# Altium PCB PCB1.PcbDoc
Units mm, origin at the board's own origin, x right, y up, seen from the top; angles counter-clockwise.
Board outline 55 x 35 mm, 2 copper layers (Top Layer, Bottom Layer), stack 1.1 mm thick; 16 components, 15 nets, 69 pads, 2 vias.
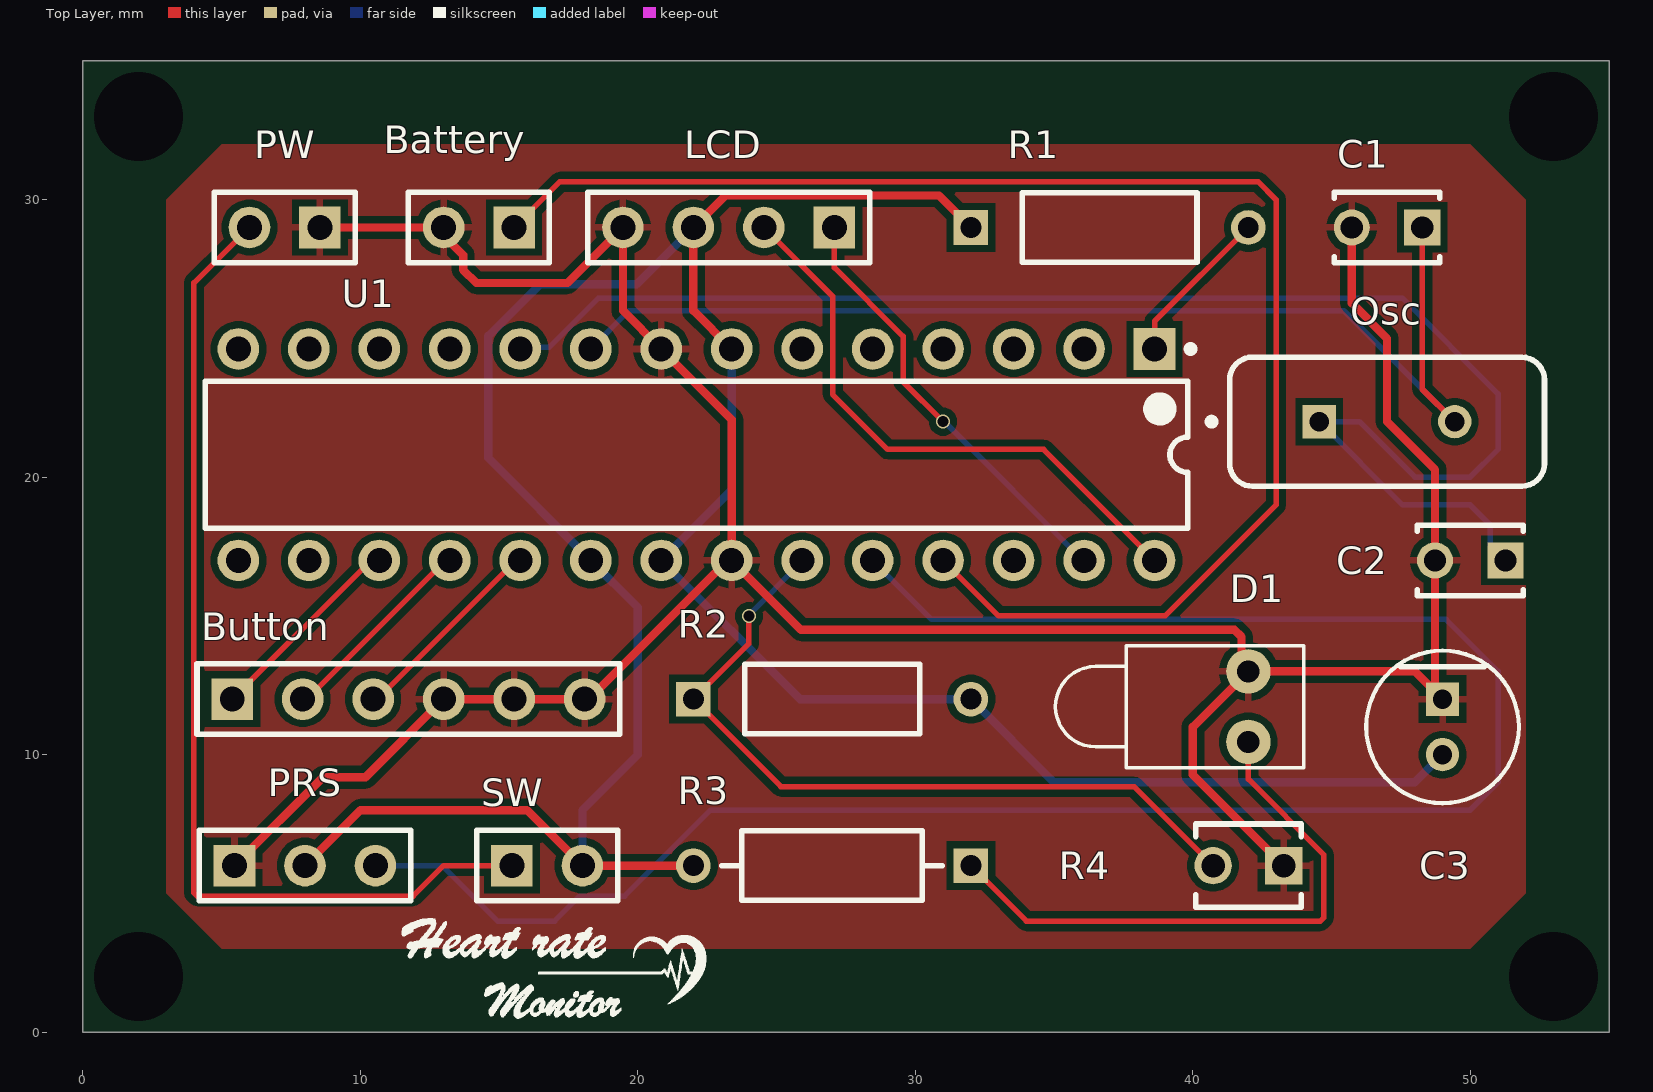
[diagram p0: Top Layer view]
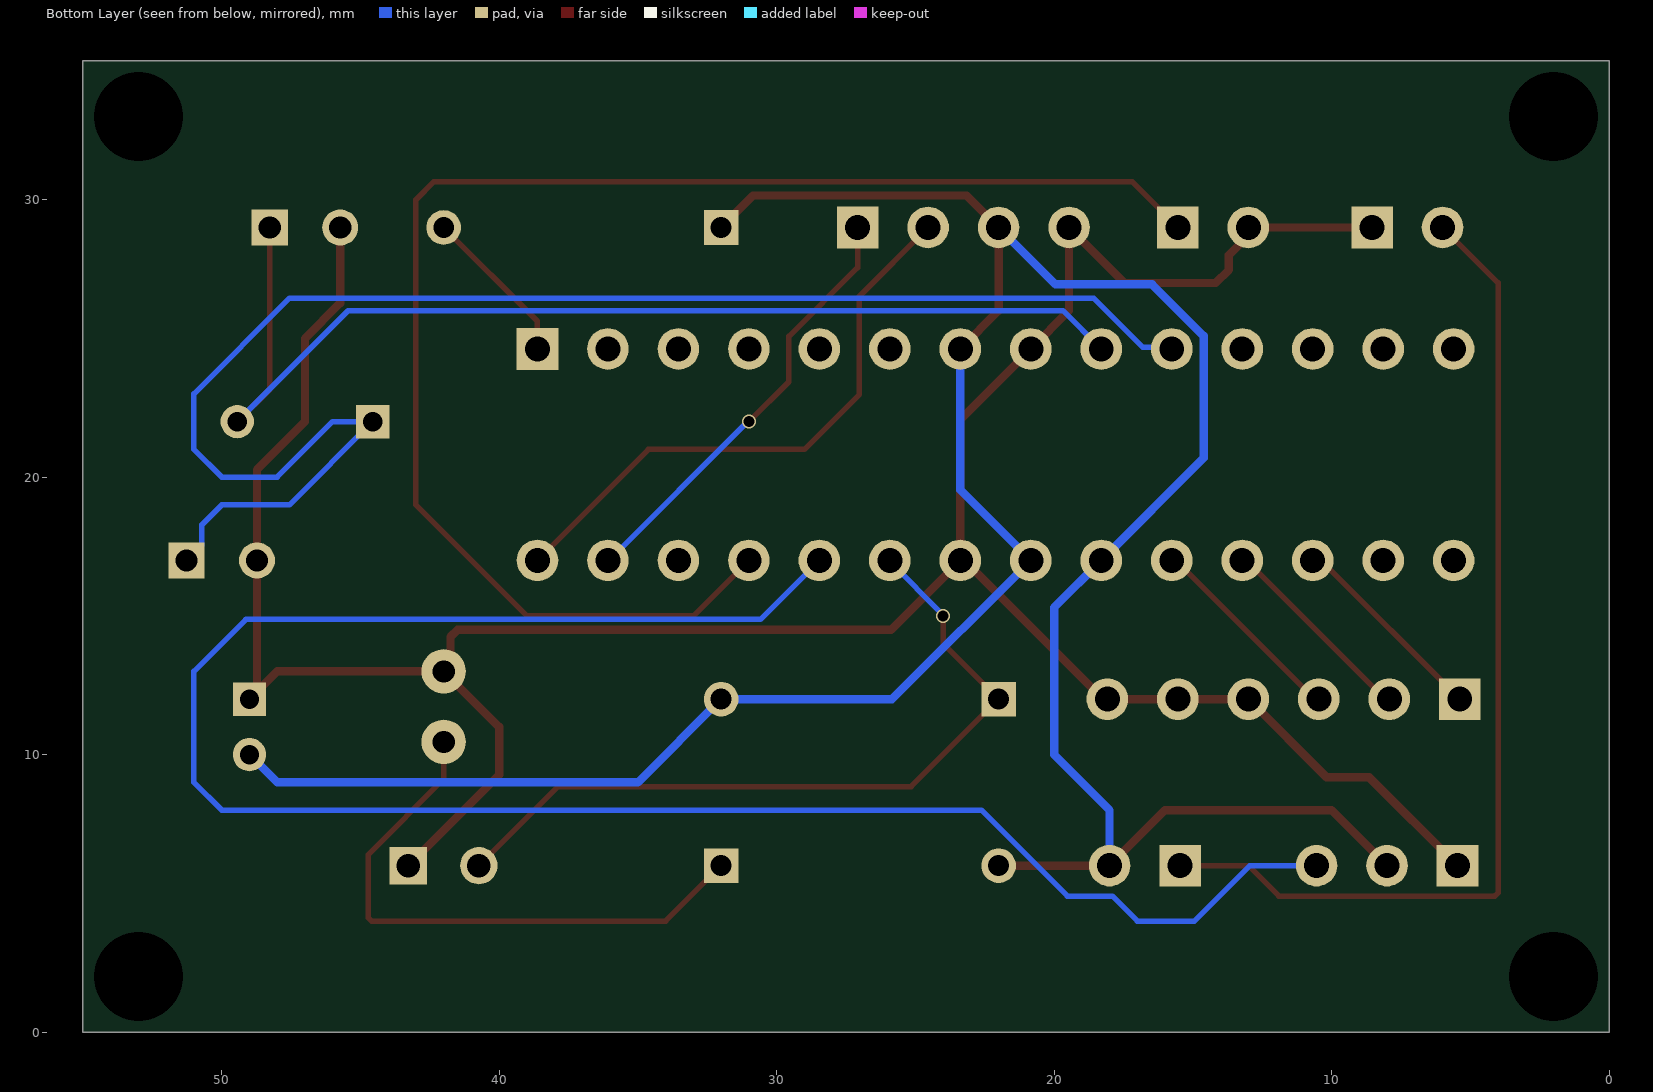
[diagram p1: Bottom Layer view, seen from below]

## Layer stack, top to bottom
Top Solder: solder mask 0.05, SM-001, Dk 4
Top Layer: signal copper 0.1
Dielectric 1: dielectric 0.9, FR-4, Dk 4.8
Bottom Layer: signal copper 0.1
Bottom Solder: solder mask 0.05, SM-001, Dk 4

## Board outline
0,0 55,0 55,35 0,35

## Design rules (kind name [scope] priority, off if disabled: settings)
Clearance [All] p1: gap=0.25 ignorepadtopadclearanceinfootprint=FALSE
HoleSize [All] p1: absolutevalues=TRUE maxlimit=3.5 minlimit=0.025 maxpercent=80.000 minpercent=20.000
PolygonConnect [All] p1: connectstyle=Relief reliefconductorwidth=0.254 reliefentries=4 polygonreliefangle="90 Angle" airgapwidth=0.254
RoutingVias [All] p1: holewidth=0.4 width=0.5 viastyle="Through Hole" minholewidth=0.4 minwidth=0.5 maxholewidth=0.4 maxwidth=0.5
SilkToSolderMaskClearance [IsPad] p1: minsilkscreentomaskgap=0.06 clearancetoexposedcopper=TRUE
SolderMaskExpansion [All] p1: expansion=0.102 istentingtop=FALSE
Width Width_PW [(InNet('5V') OR InNet('GND'))] p1: maxlimit=0.3 minlimit=0.2 preferedwidth=0.3
Width [All] p2: maxlimit=0.2 minlimit=0.1 preferedwidth=0.2
28 further rules are at their usual default settings.

## Components (designator, comment, footprint, x,y, rotation, side; value= is the part's Value field where it differs from the comment)
Battery "Header 2" HDR1X2 15.54,29 r180 top
Button "Header 6" HDR1X6 5.38,12 r0 top
C1 "C315C220K1G5TA" KEMT-C315-THT-2 47,29 r180 top
C2 "C315C220K1G5TA" KEMT-C315-THT-2 50,17 r180 top
C3 "ECA2AM100" FP-RAD-TH-D_5_0_5-L_11_1-MFG 49,11 r270 top
D1 "LED1" LED-1 42,11.73 r180 top
LCD "Header 4" HDR1X4 27.08,29 r180 top
Osc "Osc1" FOX-FOXSLF160-20 47,22 r0 top
PRS "Header 3" HDR1X3 5.46,6 r0 top (schematic designator "Pulse Rate Sensor")
PW "Header 1" HDR1X2 8.54,29 r180 top
R1 "MBB02070C1002FCT00" FP-MBB0207-MFG 37,29 r0 top
R2 "MBB02070C1002FCT00" FP-MBB0207-MFG 27,12 r0 top
R3 "MRS25000C1001FCT00" FP-MRS25-MFG 27,6 r180 top
R4 "NTCLE100E3104JB0" FP-NTCLE100E3104JB0-MFG 42,6 r180 top
SW "Header 2" HDR1X2 15.46,6 r0 top
U1 "ATmega328P-PU" 28P3 22.11,20.81 r270 top

## Footprints (in the part's own frame and the unit in brackets; to place one, negate y for a bottom-side part, rotate by r counter-clockwise, add the part's x,y. Pads: shape width x height; smd on the part's side, far side on the other; paste and mask are expansions set on the pad)
28P3 [mm] "28-Pin Plastic Dual In-Line Package (PDIP)"
  rect 1.5x1.5 hole 0.9: 1(-3.81,16.51)
  round 1.5 hole 0.9: 2(-3.81,13.97) 3(-3.81,11.43) 4(-3.81,8.89) 5(-3.81,6.35) 6(-3.81,3.81) 7(-3.81,1.27) 8(-3.81,-1.27) 9(-3.81,-3.81) 10(-3.81,-6.35) 11(-3.81,-8.89) 12(-3.81,-11.43) 13(-3.81,-13.97) 14(-3.81,-16.51) 15(3.81,-16.51) 16(3.81,-13.97) 17(3.81,-11.43) 18(3.81,-8.89) 19(3.81,-6.35) 20(3.81,-3.81) 21(3.81,-1.27) 22(3.81,1.27) 23(3.81,3.81) 24(3.81,6.35) 25(3.81,8.89) 26(3.81,11.43) 27(3.81,13.97) 28(3.81,16.51)
  silkscreen extent -3.93,-17.7 2.65,17.94, body extent -3.6,-17.65 3.6,17.65, height 4.58
FOX-FOXSLF160-20 [mm] "THD, 2-Leads, Body 11.35x4.65mm"
  rect 1.2x1.2 hole 0.7: 1(-2.44,0)
  round 1.2 hole 0.7: 2(2.44,0)
  silkscreen extent -6.45,-2.32 5.68,2.32, body extent -5.67,-2.32 5.68,2.33, height 3.6
FP-MBB0207-MFG [mm]
  rect 1.25x1.25 hole 0.75 paste-1000 mask+0: 1(-5,0)
  round 1.25 hole 0.75 paste-1000 mask+0: 2(5,0)
  silkscreen extent -3.15,-1.25 3.15,1.25, body extent -5.72,-1.35 5.72,1.35, height 0.25
FP-MRS25-MFG [mm]
  rect 1.25x1.25 hole 0.75 paste-1000 mask+0: 1(-5,0)
  round 1.25 hole 0.75 paste-1000 mask+0: 2(5,0)
  silkscreen extent -3.98,-1.25 3.98,1.25, body extent -5.72,-1.35 5.72,1.35, height 0.25
FP-NTCLE100E3104JB0-MFG [mm]
  rect 1.35x1.35 hole 0.85 paste-1000 mask+0: 1(-1.27,0)
  round 1.35 hole 0.85 paste-1000 mask+0: 2(1.27,0)
  silkscreen extent -1.9,-1.5 1.9,1.5, body extent -2.04,-1.6 2.04,1.6, height 0.25
FP-RAD-TH-D_5_0_5-L_11_1-MFG [mm]
  rect 1.2x1.2 hole 0.7 paste-1000 mask+0: 1(-1,0)
  round 1.2 hole 0.7 paste-1000 mask+0: 2(1,0)
  silkscreen extent -2.75,-2.75 2.75,2.75, body extent -2.85,-2.85 2.85,2.85, height 0.25
HDR1X2 [mm] "Connector; Header; 2 Position"
  rect 1.5x1.5 hole 0.9: 1(0,0)
  round 1.5 hole 0.9: 2(2.54,0)
  silkscreen extent -1.27,-1.27 3.81,1.27
HDR1X3 [mm] "Connector; Header; 3 Position"
  rect 1.5x1.5 hole 0.9: 1(0,0)
  round 1.5 hole 0.9: 2(2.54,0) 3(5.08,0)
  silkscreen extent -1.27,-1.27 6.35,1.27
HDR1X4 [mm] "Connector; Header; 4 Position"
  rect 1.5x1.5 hole 0.9: 1(0,0)
  round 1.5 hole 0.9: 2(2.54,0) 3(5.08,0) 4(7.62,0)
  silkscreen extent -1.27,-1.27 8.89,1.27
HDR1X6 [mm] "Connector; Header; 6 Position"
  rect 1.5x1.5 hole 0.9: 1(0,0)
  round 1.5 hole 0.9: 2(2.54,0) 3(5.08,0) 4(7.62,0) 5(10.16,0) 6(12.7,0)
  silkscreen extent -1.27,-1.27 13.97,1.27
KEMT-C315-THT-2 [mm] "THD, 2-Leads, Body 3.81x2.54mm"
  rect 1.3x1.3 hole 0.8: 1(-1.27,0)
  round 1.3 hole 0.8: 2(1.27,0)
  silkscreen extent -1.91,-1.27 1.91,1.27, body extent -1.91,-1.27 1.91,1.27, height 4.66
LED-1 [mm] "LED; 2 Leads"
  round 1.6 hole 0.8: 1(0,1.27) 2(0,-1.27)
  silkscreen extent -2,-2.2 6.95,2.2

## Part data
Battery SW: "Header, 2-Pin", LatestRevisionDate=17-Jul-2002, LatestRevisionNote="Re-released for DXP Platform.", Publisher="Altium Limited"
Button: "Header, 6-Pin", LatestRevisionDate=17-Jul-2002, LatestRevisionNote="Re-released for DXP Platform.", Publisher="Altium Limited"
C1 C2: library part CMP-1664-00008-1, "Capacitor, Ceramic, 22 pF, +/-10 %, 100 V, -55 to 125 degC, 2-Pin THD, RoHS, Bulk", Case\Package=TO-220, Max Input Voltage="40 V", Max Operating Temperature="125 degC", Max Ouput Current="1.5 A", Min Input Voltage="4.2 V", Min Operating Temperature="0 degC", Output Voltage="1.2 V", Package Quantity=50, ComponentLink1Description="Manufacturer URL", ComponentLink1URL=http://www.kemet.com/, ComponentLink2Description=Datasheet, ComponentLink2URL=http://capacitoredge.kemet.com/capedge2/DataSheet/Datasheet-C315C220K1G5TA.pdf?pn=C315C220K1G5TA{BULK}, DatasheetVersion=Aug-16, Height="9.28 mm", Length="10.28 mm", Mount="Through Hole", Output Current="1.5 A", Outputs=1, PackageDescription="2-Pin Through Hole Device, Body 3.81 x 2.54 mm", PackageReference=C315-THT-2, Packaging=Rail/Tube, Pins=3, Radiation Hardening=No, REACH SVHC="No SVHC", RoHSCompliant=true, Weight="0.08113 oz", Width="4.82 mm"
C3: library part CMP-05427-000869-1, "Aluminum Electrolytic Capacitors (Radial Lead Type) 10uF ±20% 100V", Capacitance=10uF, Case/Package=Radial, Dielectric Material=Aluminium, Leakage Current=3uA, Max Operating Temperature=85°C, Min Operating Temperature=-40°C, Package Quantity=200, Ripple Current=70mA, Tolerance=20%, Voltage=100V, Construction=RADIAL, Contact Plating=Tin, Diameter=5mm, Dissipation Factor=0.1%, Height=11mm, Height - Seated (Max)=0.472inch, Lead Diameter=0.5mm, Lead Free="Lead Free", Lead Pitch=2mm, Lead/Base Style=Straight, Length=11mm, Life (Hours)=2000Hour, Mount="Through Hole", Number of Pins=2, Packaging=Bulk, Polarity=Polar, Radiation Hardening=No, REACH SVHC="No SVHC", Ripple Current (AC)=70mA, RoHS Compliant=Yes, Series=M, Termination=Radial, Voltage Rating=100V, Voltage Rating (DC)=100V, Width=5mm
D1: "Typical RED GaAs LED", LatestRevisionDate=08-Jul-2005, LatestRevisionNote="Mech Layer 1 removed.", PackageDescription="LED; 2 Leads", PackageReference=LED-1, Published=8-Jun-2000, Publisher="Altium Limited"
LCD: "Header, 4-Pin", LatestRevisionDate=17-Jul-2002, LatestRevisionNote="Re-released for DXP Platform.", Publisher="Altium Limited"
Osc: library part CMP-1749-00003-1, "Resistance Weld Thru-Hole Crystal, 16 MHz, -20 to 70 degC, 2-Pin THD, RoHS, Bulk", Case\Package=Axial, Max Operating Temperature="155 degC", Min Operating Temperature="-55 degC", Package Quantity=200, Power Rating="250 mW", Resistance="221 kohm", Tolerance=1%, Voltage Rating="250 V", ComponentLink1Description="Manufacturer URL", ComponentLink1URL=http://www.foxonline.com/, ComponentLink2Description=Datasheet, ComponentLink2URL=http://www.foxonline.com/pdfs/hc49slf.pdf, DatasheetVersion=Mar-15, Length="0.248 inch", Mount="Through Hole", PackageDescription="2-Pin Through Hole Device, Body 11.35 x 4.65 mm", PackageReference=FOXSLF160-20, Packaging=Bulk, RoHSCompliant=true
PRS: "Header, 3-Pin", LatestRevisionDate=17-Jul-2002, LatestRevisionNote="Re-released for DXP Platform.", Publisher="Altium Limited"
PW: library part "Header 2", "Header, 2-Pin", LatestRevisionDate=17-Jul-2002, LatestRevisionNote="Re-released for DXP Platform.", Publisher="Altium Limited"
R1 R2: library part CMP-02408-000035-1, "RES 10K OHM 0.6W 1% AXIAL", Case/Package=Conformal, Max Operating Temperature=155°C, Max Power Dissipation=600mW, Min Operating Temperature=-55°C, Resistance=10kR, Resistance Tolerance=1%, Resistor Type="Metal Film", Temperature Coefficient=50ppm/°C, Voltage Rating=300V, Construction=Cylindrical, Contact Plating=Tin, Diameter=2.5mm, Features="Automotive AEC-Q200", Lead Free="Lead Free", Length=6.5mm, Military Standard=Not, Number of Terminations=2, Packaging="Tape and Reel", Power Rating=600mW, Radiation Hardening=No, RoHS Compliant=Yes, Series="MBB 0207 - Professional", Technology="THIN FILM", Termination=Axial, Tolerance=1%, Voltage Rating (DC)=300V
R3: library part CMP-02408-000051-1, "RES 1K OHM 0.6W 1% AXIAL", Case/Package=Axial, Max Operating Temperature=155°C, Max Power Dissipation=600mW, Min Operating Temperature=-55°C, Package Quantity=5000, Resistance=1kR, Resistance Tolerance=1%, Resistor Type="Metal Film", Temperature Coefficient=50ppm/°C, Voltage Rating=350V, Construction=Cylindrical, Contact Plating=Tin, Diameter=2.5mm, Lead Diameter=0.6mm, Lead Free="Lead Free", Length=6.5mm, Military Standard=Not, Mount="Through Hole", Number of Pins=2, Number of Terminations=2, Packaging="Tape and Reel", Power Rating=600mW, Radiation Hardening=No, RoHS Compliant=Yes, Series=MRS25, Technology="THIN FILM", Termination=Axial, Tolerance=1%, Voltage Rating (DC)=350V, Weight=0.00776oz, Width=2.5mm
R4: library part CMP-02404-000021-1, "NTC THERMISTOR 100K OHM 5% BEAD", Case/Package=Radial, Max Operating Temperature=125°C, Max Power Dissipation=500mW, Min Operating Temperature=-40°C, Package Quantity=500, Resistance=100kR, Resistance Tolerance=5%, Accuracy=1.5%, Depth=3mm, Height=9mm, Lead Diameter=0.6mm, Lead Free="Lead Free", Lead Length=17mm, Lead Pitch=2.54mm, Length=3.3mm, Mount="Through Hole", Number of Pins=2, Packaging=Bulk, Radiation Hardening=No, RoHS Compliant=Yes, Series=2322, Termination=Radial, Tolerance=5%
U1: library part CMP-0095-00013-2, "8-bit AVR Microcontroller, 32KB Flash, 1KB EEPROM, 2KB SRAM, 28-pin PDIP, Industrial Grade (-40°C to 85°C)", ComponentLink1Description="Manufacturer URL", ComponentLink1URL=http://www.atmel.com/, ComponentLink2Description="ATmega48A/48PA/88A/88PA/168A/168PA/328/328P Datasheet", ComponentLink2URL=http://www.atmel.com/dyn/resources/prod_documents/8271.pdf, ComponentLink3Description="ATmega48A/48PA/88A/88PA/168A/168PA/328/328P Summary", ComponentLink3URL=http://www.atmel.com/dyn/resources/prod_documents/8271S.pdf, DatasheetVersion="revD, May-2011", PackageDescription="28-lead (0.300\"/7.62mm Wide) Plastic Dual Inline Package (PDIP)", PackageReference=28P3, PackageVersion="revB, Sep-2001", RevisionNote="DatasheetVersion updated. URLs added."

## Free pads (board coordinates)
  round 1.524 hole 3.2: 6(2,33) 7(2,2) 8(53,2) 9(53,33)

## Via types
v1: diameter 0.5, hole 0.4, Top Layer to Bottom Layer, 2 vias

## Nets (pads, with @x,y where several pads share a name; then routed paths per layer and width w, separated by ;. In a path a pad name is that pad's centre, name@x,y a point inside that pad or via, vN(x,y) a via of type N, cw(c..) or ccw(c..) an arc to the next point about the centre after c; other vN are vias at no path point)
5V: C3.2 LCD.3 PRS.2 R1.1 R2.2 R3.2 SW.2 U1.7 U1.20 U1.21 | length 103.3
  Top Layer w0.3: PRS.2 10,8 16,8 SW.2 R3.2 ; U1.7 22,26 LCD.3 23.15,30.15 30.85,30.15 R1.1
  Bottom Layer w0.3: SW.2 18,8 20,10 20,15.3 U1.20 14.61,20.69 14.61,25.096 16.464,26.95 19.95,26.95 LCD.3 ; U1.7 23.38,19.54 U1.21 25.84,12 R2.2 35,9 47.995,9 48.995,10 C3.2
GND: Battery.2 Button.4 Button.5 Button.6 C1.2 C2.2 C3.1 D1.2 LCD.4 PRS.1 PW.1 R4.1 U1.8 U1.22 | length 104.6
  Top Layer w0.3: PRS.1 8.645,9.185 10.185,9.185 Button.4 Button.5 Button.6 18.23,12 23.23,17 U1.22 ; PW.1 Battery.2 13,28.708 13.703,28.006 13.703,27.473 14.176,27 17.46,27 LCD.4 19.46,26 U1.8 23.38,22.08 U1.22 ; R4.1 40,9.27 40,11 D1.2 ; C1.2 45.73,26.27 47,25 47,22 48.73,20.27 C2.2 C3.1@48.73,12.27 ; C3.1 C3.1@48.73,12.27 ; U1.22 25.88,14.5 41.5,14.5 41.751,14.249 41.751,13.249 D1.2 ; D1.2 48,13 C3.1@48.73,12.27
NetBattery_1: Battery.1 U1.25 | length 53.9
  Top Layer w0.2: Battery.1 17.19,30.65 42.35,30.65 43,30 43,19 39,15 33,15 U1.25
NetButton_1: Button.1 U1.17 | length 7.4
  Top Layer w0.2: Button.1 10.38,17 U1.17
NetButton_2: Button.2 U1.18 | length 7.4
  Top Layer w0.2: Button.2 8.07,12 13.07,17 U1.18
NetButton_3: Button.3 U1.19 | length 7.4
  Top Layer w0.2: Button.3 10.61,12 15.61,17 U1.19
NetC1_1: C1.1 Osc.2 U1.9 | length 40.9
  Top Layer w0.2: C1.1 48.27,23.17 Osc.2
  Bottom Layer w0.2: U1.9 19.68,26 45.44,26 Osc.2
NetC2_1: C2.1 Osc.1 U1.10 | length 56.3
  Bottom Layer w0.2: U1.10 15.826,24.686 16.81,24.686 18.574,26.45 47.55,26.45 51,23 51,21 50,20 48,20 46,22 Osc.1 47.56,19 50,19 50.72,18.28 50.72,17.55 C2.1
NetD1_1: D1.1 R3.1 | length 21.1
  Top Layer w0.2: R3.1 34,4 44.6,4 44.717,4.117 44.717,6.398 42,9.115 D1.1
NetLCD_1: LCD.1 U1.27 | length 15.8
  Top Layer w0.2: LCD.1 27.08,27.556 29.56,25.076 29.56,23.44 v1(31,22)
  Bottom Layer w0.2: v1(31,22) 31.04,22 36.04,17 U1.27
NetLCD_2: LCD.2 U1.28 | length 21.1
  Top Layer w0.2: LCD.2 27.02,26.52 27.02,22.98 29,21 34.62,21 U1.28
"NetPulse Rate Sensor_3": PRS.3 U1.24 | length 71.6
  Bottom Layer w0.2: PRS.3 12.946,6 14.946,4 17,4 17.9,4.9 19.521,4.9 22.621,8 50,8 51,9 51,13 49.124,14.876 30.584,14.876 U1.24
NetPW_2: PW.2 SW.1 | length 36.8
  Top Layer w0.2: PW.2 4,27 4,5.017 4.117,4.9 11.9,4.9 13,6 SW.1
NetR1_2: R1.2 U1.1 | length 5.8
  Top Layer w0.2: U1.1 38.62,25.62 R1.2
NetR2_1: R2.1 R4.2 U1.23 | length 27.8
  Top Layer w0.2: v1(24,15) 24,14 R2.1 25.152,8.848 37.882,8.848 R4.2
  Bottom Layer w0.2: v1(24,15) 24,15.04 25.92,16.96 U1.23
pads on no net: U1.2 U1.3 U1.4 U1.5 U1.6 U1.11 U1.12 U1.13 U1.14 U1.15 U1.16 U1.26

## Polygon pours and split planes (outlines as drawn)
GND on Top Layer "GND_L01_P-001" (solid, remove dead copper, pour order 1): 5,32 3,30 3,5 5,3 50,3 52,5 52,30 50,32

## Silkscreen, mask and mechanical layers (free items; w line width, h text height)
Top Overlay:
  drawing of 6 lines, arcs and shapes, not listed
Mechanical 1:
  the board outline again, w0.3